# Altium PCB PCB2.PcbDoc (part 2 of 2)
Units mm, origin at the board's own origin, x right, y up, seen from the top; angles counter-clockwise.
Board outline 99.5 x 79.18 mm, 4 copper layers (Top Layer, Int1 (GND), Int2 (PWR), Bottom Layer), stack 1.317 mm thick; 113 components, 127 nets, 520 pads, 144 vias.
Unrouted connection lines stored in the file: 1.
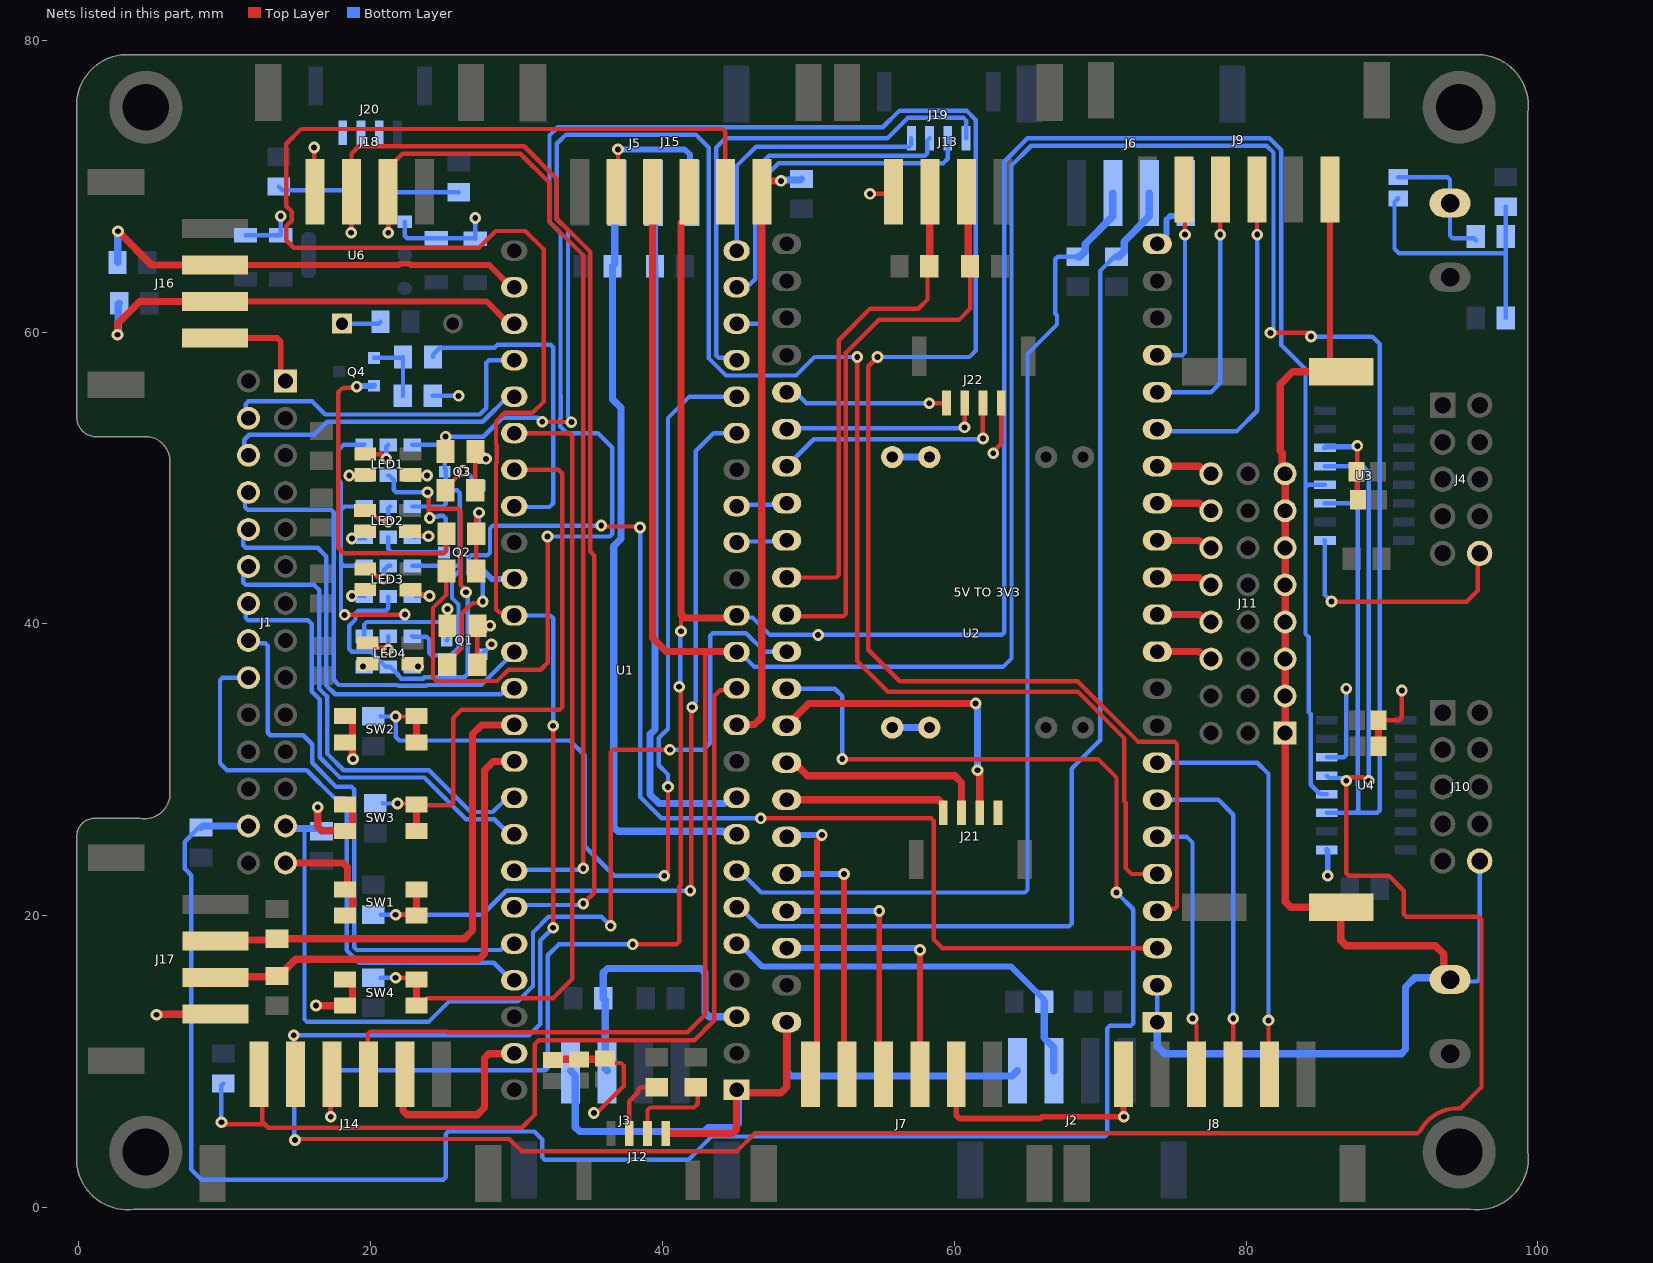
[diagram p4: the nets of this part, all layers, seen from the top]

## Via types
v1: diameter 0.8, hole 0.4, Top Layer to Bottom Layer, tented both sides, 144 vias

## Nets (pads, with @x,y where several pads share a name; then routed paths per layer and width w, separated by ;. In a path a pad name is that pad's centre, name@x,y a point inside that pad or via, vN(x,y) a via of type N, cw(c..) or ccw(c..) an arc to the next point about the centre after c; other vN are vias at no path point) (continued)
ENA3: J6.2 R8.1 U1.7 | length 71.8
  Bottom Layer w0.3: U1.7@45.085,23.074 45.285,23.074 46.769,21.59 64.848,21.59 65.024,21.766 65.024,58.502 67.044,60.522 67.044,61.144 66.929,61.259 66.929,64.984 67.105,65.16 R8.1@68.453,65.16
  Bottom Layer w0.5: R8.1@68.453,65.16 68.603,65.16 68.978,65.535 68.978,66.038 70.867,67.927 J6.2@70.867,69.527
ENA4: J5.2 R7.1 U1.8 | length 52.7
  Bottom Layer w0.5: J5.2@36.885,69.527 36.731,69.373 36.731,64.671 R7.1@36.576,64.516 36.576,55.397 37.164,54.809 37.164,45.84 36.664,45.34 36.664,26.074 36.957,25.781 44.142,25.781 44.177,25.746 44.913,25.746 U1.8@45.085,25.574
ENB1: J3.3 R1.1 U1.3 | length 19.1
  Bottom Layer w0.5: J3.3@36.215,9.368 36.078,9.505 36.078,14.214 R1.1@35.941,14.351 35.941,16.09 36.234,16.383 42.633,16.383 42.926,16.09 42.926,13.367 43.219,13.074 U1.3@45.085,13.074
ENB2: J2.3 R4.1 U1.5 | length 27.8
  Bottom Layer w0.4: U1.5@45.085,18.074 45.285,18.074 46.849,16.51 63.904,16.51 66.167,14.247 R4.1@66.167,14.097
  Bottom Layer w0.5: R4.1@66.167,14.097 66.167,11.623 66.822,10.968 J2.3@66.822,9.368
ENB3: J6.3 R9.1 U1.6 | length 76
  Bottom Layer w0.3: U1.6@45.085,20.574 45.285,20.574 46.589,19.27 67.867,19.27 68.043,19.446 68.043,30.07 69.995,32.022 69.995,64.185 70.97,65.16 R9.1@71.12,65.16
  Bottom Layer w0.5: R9.1@71.12,65.16 71.27,65.16 71.645,65.535 71.645,66.205 73.367,67.927 J6.3@73.367,69.527
ENB4: J5.3 R6.1 U1.9 | length 47.7
  Bottom Layer w0.5: J5.3@39.385,69.527 39.436,69.476 39.436,64.568 R6.1@39.488,64.516 39.488,32.761 39.154,32.428 39.154,28.312 39.781,27.686 44.253,27.686 44.641,28.074 U1.9@45.085,28.074
EP_A: J21.1 U2.38 | length 11.4
  Top Layer w0.5: U2.38@48.514,27.94 58.903,27.94 59.242,27.601 J21.1@59.242,27.051
EP_B: J21.2 U2.37 | length 14.6
  Top Layer w0.5: U2.37@48.514,30.48 49.058,30.48 49.947,29.591 60.032,29.591 60.492,29.131 J21.2@60.492,27.051
EP_C: J21.3 U2.36 | length 21.2
  Top Layer w0.5: U2.36@48.514,33.02 50.038,34.544 v1(61.468,34.544) ; v1(61.595,29.972) 61.595,29.891 61.742,29.744 J21.3@61.742,27.051
  Bottom Layer w0.5: v1(61.468,34.544) 61.468,34.463 61.595,34.336 v1(61.595,29.972)
EP_D: J21.4
EP_E: J22.1 | length 3.7
  Top Layer w0.3: v1(62.674,51.689) 62.674,51.807 63.216,52.349 J22.1@63.216,55.129
EP_F: J22.2 U2.29 | length 16.7
  Top Layer w0.3: J22.2@61.966,55.129 61.966,52.715 v1(61.976,52.705)
  Bottom Layer w0.3: U2.29@48.514,50.8 50.367,52.653 61.924,52.653 v1(61.976,52.705)
EP_G: J22.3 U2.28 | length 13.9
  Top Layer w0.3: v1(60.706,53.467) 60.716,53.477 J22.3@60.716,55.129
  Bottom Layer w0.3: U2.28@48.514,53.34 48.578,53.404 60.642,53.404 v1(60.706,53.467)
EP_H: J22.4 U2.27 | length 11.3
  Top Layer w0.3: v1(58.293,55.118) 59.455,55.118 J22.4@59.466,55.129
  Bottom Layer w0.3: U2.27@48.514,55.88 49.108,55.88 49.87,55.118 v1(58.293,55.118)
ESP_CS: J7.6 U2.39 | length 19.2
  Top Layer w0.4: J7.6@50.138,9.144 50.588,9.594 50.588,25.08 50.927,25.419 v1(50.927,25.527)
  Bottom Layer w0.4: U2.39@48.514,25.4 48.641,25.527 v1(50.927,25.527)
ESP_MISO: J7.4 U2.41 | length 17.6
  Top Layer w0.4: v1(54.864,20.32) 54.864,9.418 J7.4@55.138,9.144
  Bottom Layer w0.4: U2.41@48.514,20.32 v1(54.864,20.32)
ESP_MOSI: J7.3 U2.42 | length 17.7
  Top Layer w0.4: J7.3@57.638,9.144 57.658,9.164 v1(57.658,17.653)
  Bottom Layer w0.4: U2.42@48.514,17.78 57.531,17.78 v1(57.658,17.653)
ESP_RX1: J13.2 R13.2 U2.33 | length 40
  Top Layer w0.3: U2.33@48.514,40.64 48.641,40.513 52.402,40.513 52.578,40.689 52.578,58.58 54.831,60.833 60.325,60.833 61.087,61.595 R13.2@61.087,64.516
  Top Layer w0.5: J13.2@60.848,69.626 60.968,69.506 60.968,64.636 R13.2@61.087,64.516
ESP_SCK: J7.5 U2.40 | length 17.7
  Top Layer w0.4: v1(52.451,22.86) 52.451,9.331 J7.5@52.638,9.144
  Bottom Layer w0.4: U2.40@48.514,22.86 v1(52.451,22.86)
ESP_SCL1: J12.2 R11.2 | length 4.6
  Top Layer w0.3: J12.2@37.729,5.069 37.729,7.29 38.338,7.899 38.338,8.079 38.514,8.255 39.615,8.255 R11.2@39.624,8.246
ESP_SDA1: J12.3 R12.2 | length 6.4
  Top Layer w0.3: J12.3@38.979,5.069 38.979,6.682 39.155,6.858 42.164,6.858 42.418,7.112 42.418,8.119 R12.2@42.291,8.246
ESP_TX1: J13.3 R14.2 U2.32 | length 34.4
  Top Layer w0.3: U2.32@48.514,43.18 51.902,43.18 52.078,43.356 52.078,59.444 54.229,61.595 57.531,61.595 58.166,62.23 58.166,64.389 R14.2@58.293,64.516
  Top Layer w0.5: R14.2@58.293,64.516 58.321,64.544 58.321,69.598 J13.3@58.348,69.626
GND: "5V TO 3V3.2" "5V TO 3V3.3" C1.1 C2.1 C3.1 C4.1 C5.1 C6.1 C7.1 C8.1 C9.2 C10.2 C11.2 C12.2 C13.1 C14.1 H1.1 H2.1 J1.1 J1.27 J2.4 J3.4 J4.10 J5.4 J6.4 J7.2 J8.6 J9.6 J10.10 J11.1 J11.4 J11.7 J11.10 J11.13 J11.16 J11.19 J11.22 J12.4 J13.4 J14.2 J15.2 J16.4 J17.4 J18.4 Q1.2 Q2.2 Q3.2 Q4.2 R25.1 R26.1 R33.1 R41.1 R46.1 SW1.B1 SW1.B2 SW2.B1 SW2.B2 SW3.B1 SW3.B2 SW4.B1 SW4.B2 U1.1 U1.34 U1.47 U2.1 U2.2 U2.22 U2.44 U3.9 U3.14 U4.9 U4.14 U6.1 | length 347.7
  Top Layer w0.3: v1(16.129,72.644) 16.129,69.686 J18.4@16.189,69.626 ; v1(19.05,56.261) 18.962,56.173 18.2,56.173 18.161,56.134 18.034,56.134 17.78,55.88 17.78,45.212 18.161,44.831 25.022,44.831 25.198,45.007 R33.1@25.198,46.167 ; R41.1@25.128,49.149 25.128,49.299 26.313,50.484 v1(26.338,50.484) ; R25.1@25.273,39.878 v1(25.273,41.021) ; v1(35.306,6.477) 35.402,6.573 35.598,6.573 37.338,8.313 37.338,9.73 37.162,9.906 36.375,9.906 C1.1@36.068,10.213 ; J15.2@36.815,69.626 36.957,69.768 v1(36.957,72.517) ; v1(54.229,69.469) 55.691,69.469 J13.4@55.848,69.626 ; v1(85.852,41.529) 95.123,41.529 95.885,42.291 95.885,44.707 J4.10@96.009,44.831 ; C2.1@87.577,50.419 87.63,50.472 v1(87.63,52.197) ; C7.1@89.067,33.401 90.502,33.401 90.678,33.577 v1(90.678,35.433)
  Top Layer w0.4: J16.4@9.34,59.588 13.609,59.588 13.843,59.354 13.843,56.666 J1.1@13.81,56.633 ; J7.2@60.138,9.144 60.138,6.328 60.372,6.094 65.881,6.094 66.011,6.223 v1(71.628,6.223) 71.601,6.25 J8.6@71.601,9.144 ; J9.6@85.752,69.772 85.752,58.027 86.502,57.277 C4.1@86.519,57.277 ; C2.1@87.577,50.419 87.622,50.374 87.622,48.559 C3.1@87.667,48.514
  Top Layer w0.5: v1(5.334,13.208) 5.364,13.238 9.338,13.238 J17.4@9.368,13.268 ; J1.27@13.81,23.613 18.122,23.613 18.415,23.32 18.415,21.973 SW1.B2@18.247,21.805 ; v1(16.256,13.843) 16.267,13.832 SW4.B1@18.247,13.832 ; v1(16.383,27.432) 16.383,26.107 16.676,25.814 SW3.B1@18.247,25.814 ; SW2.B1@18.247,31.878 18.447,31.878 18.747,31.578 18.747,30.783 v1(18.796,30.734) ; SW4.B1@18.755,13.832 SW4.B2@18.755,15.632 ; SW1.B1@18.755,20.005 SW1.B2@18.755,21.805 ; SW3.B1@18.755,25.814 SW3.B2@18.755,27.614 ; SW2.B1@18.755,31.878 SW2.B2@18.755,33.678 ; J14.2@22.359,9.144 22.225,9.01 22.225,6.643 22.518,6.35 27.305,6.35 27.813,6.858 27.813,10.248 28.106,10.541 29.812,10.541 U1.47@29.845,10.574 ; C13.1@32.498,10.123 32.543,10.168 34.29,10.168 36.023,10.168 C1.1@36.068,10.213 ; J12.4@40.229,5.069 40.24,5.08 44.792,5.08 45.085,5.373 U1.1@45.085,8.074 45.285,7.874 48.133,7.874 48.514,8.255 U2.44@48.514,12.7 ; C4.1@86.502,57.277 83.185,57.277 82.335,56.427 82.335,51.845 82.472,51.708 82.472,50.497 J11.22@82.677,50.292 J11.19@82.677,47.752 J11.16@82.677,45.212 J11.13@82.677,42.672 J11.10@82.677,40.132 J11.7@82.677,37.592 J11.4@82.677,35.052 J11.1@82.677,32.512 82.677,20.955 83.058,20.574 C5.1@86.519,20.574 86.487,20.542 86.487,18.327 86.872,17.942 92.969,17.942 93.54,17.371 93.54,16.061 H1.1@93.98,15.621 ; C7.1@89.067,33.401 89.073,33.394 89.073,31.63 C6.1@89.08,31.623
  Bottom Layer w0.3: C9.2@11.43,66.627 C10.2@13.843,66.627 v1(13.843,67.945) ; U6.1@22.338,67.568 22.338,66.597 22.514,66.421 C11.2@24.511,66.421 27.154,66.421 C12.2@27.178,66.397 v1(27.178,67.818) ; R46.1@24.257,55.626 v1(26.035,55.626) ; v1(26.338,50.484) 26.434,50.389 26.569,50.389 Q3.2@27.489,49.469 ; Q1.2@27.616,37.912 28.281,38.577 v1(28.281,38.604) ; U2.1@73.914,12.7 U2.2@73.914,15.24 ; U3.9@85.405,45.72 85.405,41.976 v1(85.852,41.529) ; U4.14@85.532,30.861 86.692,30.861 86.868,31.037 v1(86.868,35.56) ; C8.1@90.424,70.612 93.804,70.612 93.98,70.436 H2.1@93.98,68.834 93.98,66.597 94.156,66.421 95.622,66.421 R26.1@95.749,66.294 ; H1.1@93.98,15.621 94.107,15.494 95.833,15.494 96.009,15.67 J10.10@96.009,23.749
  Bottom Layer w0.4: v1(19.05,56.261) 19.083,56.294 20.205,56.294 Q4.2@20.238,56.327 ; Q2.2@27.432,43.947 28.305,43.074 U1.34@29.845,43.074 ; v1(36.957,72.517) 41.529,72.517 41.885,72.161 J5.4@41.885,69.527 ; U2.22@73.914,66.04 73.943,66.04 74.405,66.502 74.405,66.531 74.549,66.675 74.549,67.711 74.783,67.945 75.417,67.945 75.867,68.395 J6.4@75.867,69.527 ; U3.14@85.405,52.07 85.469,52.133 87.566,52.133 v1(87.63,52.197) ; U4.9@85.532,24.511 85.598,24.445 v1(85.598,22.733)
  Bottom Layer w0.5: J3.4@33.715,9.368 34.036,9.047 34.036,5.5 34.329,5.207 42.861,5.207 43.121,5.468 44.919,5.468 45.212,5.761 45.212,7.947 U1.1@45.085,8.074 ; U2.44@48.514,12.7 48.514,9.31 48.807,9.017 63.971,9.017 J2.4@64.322,9.368 ; 55.753,32.893 58.293,32.893 ; 55.753,51.433 58.293,51.433 ; U2.1@73.914,12.7 73.914,11.033 74.406,10.541 90.639,10.541 90.932,10.834 90.932,15.113 91.567,15.748 93.853,15.748 H1.1@93.98,15.621
IN_BUZZER: R44.1 U1.32 | length 22.2
  Bottom Layer w0.3: R44.1@24.275,58.293 24.275,58.443 24.75,58.918 28.494,58.918 28.7,59.124 32.336,59.124 32.512,58.948 32.512,48.26 32.258,48.006 29.913,48.006 U1.32@29.845,48.074
LED_B: Q2.3 R21.2 R30.2 R36.2 R42.2 | length 42.3
  Top Layer w0.3: v1(23.903,49.022) 23.981,48.944 23.981,47.879 ; v1(24.058,47.25) 23.981,47.328 23.981,47.752 23.981,47.879 ; v1(26.543,42.164) 26.543,42.299 26.173,42.669 26.173,47.703 25.997,47.879 23.981,47.879
  Bottom Layer w0.3: R36.2@21.209,41.876 21.209,41.07 21.033,40.894 19.146,40.894 18.97,40.718 18.97,40.307 18.542,39.879 18.542,38.276 18.718,38.1 20.053,38.1 20.508,37.645 20.508,37.601 21.059,37.05 R42.2@21.209,37.05 21.359,37.05 21.903,36.506 21.903,36.462 22.115,36.25 23.605,36.25 23.689,36.334 26.428,36.334 26.67,36.576 26.67,42.037 v1(26.543,42.164) ; R30.2@21.209,45.94 21.209,45.134 21.446,44.897 Q2.3@25.032,44.897 25.146,45.011 25.146,47.227 24.97,47.402 24.67,47.402 24.614,47.346 24.154,47.346 v1(24.058,47.25) ; R21.2@21.209,50.165 21.29,50.165 21.59,49.865 21.59,49.198 21.766,49.022 v1(23.903,49.022) v1@23.903,49.049
LED_BLUE: R31.1 U2.4 | length 169.3
  Top Layer w0.3: R31.1@25.198,43.627 25.198,42.007 24.28,41.089 24.28,36.291 24.485,36.086 28.672,36.086 29.449,36.863 31.656,36.863 32.131,37.338 v1(32.131,45.986) ; v1(54.737,58.293) 54.102,57.658 54.102,38.227 56.261,36.068 68.453,36.068 72.591,31.93 75.088,31.93 75.264,31.754 75.264,20.648 75.088,20.472 74.066,20.472 U2.4@73.914,20.32
  Bottom Layer w0.3: v1(32.131,45.986) 36.388,45.986 36.564,46.162 36.564,52.082 35.572,53.074 33.451,53.074 33.012,53.513 33.012,54.134 33.028,54.151 33.028,55.618 33.012,55.634 33.012,66.798 32.266,67.544 32.266,73.478 32.821,74.033 43.96,74.033 43.966,74.027 55.106,74.027 56.255,75.176 60.844,75.176 61.463,74.557 61.463,58.718 61.038,58.293 v1(54.737,58.293)
LED_G: Q3.3 R24.2 R32.2 R37.2 R45.2 | length 28.2
  Bottom Layer w0.3: R45.2@22.86,39.15 22.894,39.116 23.827,39.116 24.003,38.94 24.003,38.022 24.179,37.846 25.495,37.846 26.023,38.374 26.023,41.332 25.584,41.771 25.584,43.11 26.119,43.645 26.119,43.991 ; R37.2@22.86,43.976 26.104,43.976 26.119,43.991 ; R32.2@22.86,48.04 24.97,48.04 25.146,48.216 25.146,49.149 ; R24.2@22.86,52.265 24.652,52.265 25.089,51.828 25.089,50.669 25.142,50.616 25.146,50.616 25.146,49.149 ; 25.146,49.149 25.943,49.149 26.119,48.973 26.119,43.991
LED_GREEN: R39.1 U2.5 | length 119.1
  Top Layer w0.3: R39.1@25.137,51.816 25.146,51.825 v1(25.146,52.832) ; v1(31.762,53.848) 31.774,53.836 33.75,53.836 v1(33.762,53.824) ; v1(53.352,58.293) 53.352,37.453 55.448,35.357 68.457,35.357 71.64,32.174 71.64,27.846 71.743,27.743 71.743,23.268 72.151,22.86 U2.5@73.914,22.86
  Bottom Layer w0.3: v1(25.146,52.832) 27.727,52.832 29.02,54.124 31.466,54.124 31.742,53.848 v1(31.762,53.848) ; v1(33.762,53.824) 33.762,53.959 33.528,54.193 33.528,66.989 32.766,67.751 32.766,72.898 33.401,73.533 42.291,73.533 43.188,72.636 43.188,58.195 44.359,57.024 49.163,57.024 50.432,58.293 v1(53.352,58.293)
LED_R: Q1.3 R19.2 R29.2 R34.2 R40.2 | length 29.2
  Top Layer w0.3: v1(18.22,40.618) 18.231,40.629 22.341,40.629 v1(22.352,40.64)
  Bottom Layer w0.3: v1(18.22,40.618) 18.22,40.644 17.97,40.894 17.97,44.152 ; R40.2@19.558,39.15 19.558,39.956 19.734,40.132 22.415,40.132 ; R34.2@19.558,43.976 18.146,43.976 17.97,44.152 ; R29.2@19.558,48.04 18.195,48.04 17.97,47.815 ; R19.2@19.558,52.265 18.146,52.265 17.792,51.911 17.792,49.854 17.97,49.676 17.97,47.815 ; v1(22.352,40.64) 22.415,40.576 22.415,40.132 ; Q1.3@25.216,38.862 25.273,38.919 25.273,39.956 25.097,40.132 22.415,40.132 ; 17.97,44.152 17.97,47.815
LED_RED: R23.1 U2.3 | length 86.1
  Top Layer w0.3: R23.1@25.255,37.211 25.255,37.361 26.248,38.354 26.248,40.698 26.983,41.433 27.59,41.433 v1(27.686,41.529) ; v1(35.814,46.736) 35.877,46.672 38.401,46.672 v1(38.465,46.609) ; v1(46.736,26.67) 58.416,26.67 58.592,26.494 58.592,18.37 59.182,17.78 U2.3@73.914,17.78
  Bottom Layer w0.3: v1(27.686,41.529) 27.686,42.906 27.438,43.154 26.93,43.154 26.682,43.402 26.682,44.492 26.887,44.697 28.006,44.697 28.182,44.873 28.182,46.548 28.37,46.736 v1(35.814,46.736) ; v1(38.465,46.609) 38.481,46.593 38.481,28.137 39.948,26.67 v1(46.736,26.67)
MISO: J14.4 J15.4 U1.14 U3.12 U4.12 | length 212.1
  Top Layer w0.3: v1(17.272,6.223) 17.272,9.057 J14.4@17.359,9.144 ; v1(37.973,18.034) 40.972,18.034 41.148,18.21 41.148,22.016 41.263,22.131 41.263,35.261 41.244,35.281 41.244,35.591 v1(41.148,35.687) ; v1(41.275,39.497) 41.275,40.567 41.334,40.627 41.275,40.627
  Top Layer w0.5: 41.275,40.627 41.275,67.486 41.815,68.026 J15.4@41.815,69.626 ; 41.334,40.627 41.563,40.398 44.142,40.398 44.146,40.402 44.913,40.402 U1.14@45.085,40.574
  Bottom Layer w0.3: v1(17.272,6.223) 17.272,9.017 17.653,9.398 31.965,9.398 32.141,9.574 32.141,17.282 32.893,18.034 v1(37.973,18.034) ; v1(41.148,35.687) 41.212,35.75 41.212,39.433 v1(41.275,39.497) ; U1.14@45.085,40.574 45.221,40.438 46.176,40.438 47.371,39.243 v1(50.673,39.243) 63.248,39.243 63.424,39.419 63.424,71.679 65.024,73.279 81.606,73.279 82.423,72.462 82.423,59.098 84.074,57.447 84.074,49.354 ; U3.12@85.405,49.53 84.25,49.53 84.074,49.354 ; U4.12@85.532,28.321 85.082,28.321 84.432,28.971 84.432,33.827 84.305,33.954 84.305,39.08 84.074,39.311 84.074,49.354
MOSI: J14.3 J15.3 U1.13 U3.11 U4.11 | length 239.4
  Top Layer w0.3: J14.3@19.859,9.144 19.812,9.191 19.812,11.889 19.988,12.065 25.213,12.065 25.254,12.024 41.742,12.024 42.926,13.208 42.926,38.1 ; v1(81.673,59.944) 84.201,59.944 v1(84.455,59.69)
  Top Layer w0.5: J15.3@39.315,69.626 39.315,39.044 40.259,38.1 42.926,38.1 45.059,38.1 U1.13@45.085,38.074
  Bottom Layer w0.3: U1.13@45.085,38.074 45.085,37.973 45.386,37.973 46.309,37.05 63.339,37.05 63.924,37.635 63.924,71.417 65.278,72.771 81.407,72.771 81.879,72.299 81.879,60.15 v1(81.673,59.944) ; v1(84.455,59.69) 88.646,59.69 89.154,59.182 89.154,27.227 88.978,27.051 87.503,27.051 ; U3.11@85.405,48.26 87.249,48.26 87.654,47.855 87.654,28.938 87.679,28.914 87.679,27.227 87.503,27.051 ; U4.11@85.532,27.051 87.503,27.051
NetC8_2: C8.2 R20.1 R22.2 R26.2 | length 18.9
  Bottom Layer w0.3: C8.2@90.424,69.162 90.17,68.908 90.17,65.708 90.473,65.405 97.799,65.405 ; R22.2@97.79,60.96 97.799,60.969 97.799,65.405 ; R26.2@97.79,66.303 R20.1@97.79,68.58 ; R26.2@97.799,66.294 97.799,65.405
NetLED1_2: LED1.2 R24.1 | length 2.2
  Top Layer w0.3: LED1.2@22.733,50.217 22.785,50.165 v1(23.876,50.165)
  Bottom Layer w0.3: R24.1@22.86,50.165 v1(23.876,50.165)
NetLED1_3: LED1.3 R21.1 | length 2.6
  Top Layer w0.3: LED1.3@19.633,51.634 20.756,51.634 v1(21.076,51.314)
  Bottom Layer w0.3: v1(21.076,51.314) 21.076,52.132 R21.1@21.209,52.265
NetLED1_4: LED1.4 R19.1 | length 2.1
  Top Layer w0.3: v1(18.542,50.165) 19.578,50.165 LED1.4@19.633,50.22
  Bottom Layer w0.3: v1(18.542,50.165) R19.1@19.558,50.165
NetLED2_2: LED2.2 R32.1 | length 2.4
  Top Layer w0.3: LED2.2@22.733,46.355 23.033,46.055 23.922,46.055 v1(23.973,46.004)
  Bottom Layer w0.3: R32.1@22.987,45.94 23.051,46.004 v1(23.973,46.004)
NetLED2_3: LED2.3 R30.1 | length 3
  Top Layer w0.3: LED2.3@19.633,47.772 19.933,47.772 20.62,47.086 21.113,47.086 v1(21.209,46.99)
  Bottom Layer w0.3: v1(21.209,46.99) 21.209,47.913 R30.1@21.336,48.04
NetLED2_4: LED2.4 R29.1 | length 2
  Top Layer w0.3: v1(18.72,45.847) 18.812,45.847 19.322,46.357 LED2.4@19.633,46.357
  Bottom Layer w0.3: v1(18.72,45.847) R29.1@19.592,45.847
NetLED3_2: LED3.2 R37.1 | length 2.4
  Top Layer w0.3: LED3.2@22.733,42.343 23.033,42.043 23.862,42.043 23.995,41.91 v1(24.041,41.91)
  Bottom Layer w0.3: R37.1@23.114,41.876 23.148,41.91 v1(24.041,41.91)
NetLED3_3: LED3.3 R36.1 | length 2.7
  Top Layer w0.3: LED3.3@19.633,43.76 19.933,43.76 20.499,43.195 20.805,43.195 v1(20.901,43.099)
  Bottom Layer w0.3: v1(20.901,43.099) 20.901,43.676 21.201,43.976 R36.1@21.336,43.976
NetLED3_4: LED3.4 R34.1 | length 1.9
  Top Layer w0.3: v1(18.72,41.91) 18.816,42.006 18.993,42.006 19.033,42.045 19.333,42.045 LED3.4@19.633,42.346
  Bottom Layer w0.3: v1(18.72,41.91) 19.524,41.91 R34.1@19.558,41.876
NetLED4_2: LED4.2 R45.1 | length 0.8
  Top Layer w0.3: LED4.2@22.886,37.263 23.074,37.263 v1(23.253,37.084)
  Bottom Layer w0.3: R45.1@22.86,37.05 22.894,37.084 v1(23.253,37.084)
NetLED4_3: LED4.3 R42.1 | length 2.5
  Top Layer w0.3: LED4.3@19.786,38.68 20.086,38.381 20.92,38.381 21.074,38.227 v1(21.209,38.227) v1@21.209,38.6
  Bottom Layer w0.3: v1@21.209,38.6 R42.1@21.209,39.15
NetLED4_4: LED4.4 R40.1 | length 0.6
  Top Layer w0.3: v1(19.485,37.084) 19.667,37.266 LED4.4@19.786,37.266
  Bottom Layer w0.3: v1(19.485,37.084) 19.651,37.084 R40.1@19.685,37.05
NetLS1_1: LS1.1 R47.1 | length 2.7
  Bottom Layer w0.3: LS1.1@18.044,60.579 20.556,60.579 R47.1@20.683,60.706
NetQ1_1: Q1.1 R23.2 R25.2 | length 4.2
  Top Layer w0.3: R23.2@27.305,37.211 27.323,37.229 R25.2@27.323,39.878 v1(28.194,39.878)
  Bottom Layer w0.3: Q1.1@27.616,39.812 27.649,39.845 28.161,39.845 v1(28.194,39.878)
NetQ2_1: Q2.1 R31.2 R33.2 | length 5.9
  Top Layer w0.3: R31.2@27.248,43.627 27.248,47.306 27.432,47.49 v1(27.432,47.625)
  Bottom Layer w0.3: Q2.1@27.432,45.847 v1(27.432,47.625)
NetQ3_1: Q3.1 R39.2 R41.2 | length 4.1
  Top Layer w0.3: R41.2@27.178,49.149 27.178,51.807 R39.2@27.187,51.816 27.568,51.435 27.568,51.402 27.662,51.308 v1(27.907,51.308)
  Bottom Layer w0.3: Q3.1@27.489,51.369 27.846,51.369 v1(27.907,51.308)
NetQ4_1: Q4.1 R44.2 R46.2 | length 4.7
  Bottom Layer w0.3: Q4.1@20.238,58.227 22.159,58.227 R44.2@22.225,58.293 22.225,55.644 R46.2@22.207,55.626
OUT_A: J19.1 U1.24 | length 18.8
  Bottom Layer w0.3: U1.24@45.085,65.574 45.085,71.374 46.416,72.705 56.913,72.705 57.063,72.855 J19.1@57.063,73.279
OUT_B: J19.2 U1.23 | length 22.4
  Bottom Layer w0.3: U1.23@45.085,63.074 45.295,63.284 46.012,63.284 46.358,63.63 46.358,71.128 47.309,72.079 57.987,72.079 58.163,72.255 58.163,73.129 J19.2@58.313,73.279
OUT_C: J19.3 U1.22 | length 26.3
  Bottom Layer w0.3: U1.22@45.085,60.574 46.682,60.574 46.858,60.75 46.858,70.47 47.967,71.579 59.26,71.579 59.563,71.882 J19.3@59.563,73.279
OUT_D: J19.4 U1.21 | length 35
  Bottom Layer w0.3: U1.21@45.085,58.074 44.933,58.226 43.864,58.226 43.688,58.402 43.688,72.644 44.323,73.279 55.418,73.279 56.815,74.676 60.637,74.676 60.813,74.5 J19.4@60.813,73.279
OUT_E: J20.1
OUT_F: J20.2
OUT_G: J20.3
PWM_A: J11.18 U2.14 | length 3.9
  Top Layer w0.5: U2.14@73.914,45.72 76.799,45.72 77.307,45.212 J11.18@77.597,45.212
PWM_A1: J1.6 U1.29 | length 20.8
  Bottom Layer w0.3: J1.6@11.27,51.553 11.337,51.62 11.337,52.612 11.683,52.958 16.128,52.958 17.018,53.848 27.686,53.848 29.412,55.574 U1.29@29.845,55.574
PWM_A2: J1.4 U1.28 | length 23.2
  Bottom Layer w0.3: J1.4@11.27,54.093 11.44,54.263 11.44,55.069 11.616,55.245 16.002,55.245 16.899,54.348 27.479,54.348 27.94,54.809 27.94,57.898 28.116,58.074 U1.28@29.845,58.074
PWM_B: J11.21 U2.15 | length 3.9
  Top Layer w0.5: U2.15@73.914,48.26 76.799,48.26 77.307,47.752 J11.21@77.597,47.752
PWM_B1: J1.10 U1.37 | length 29.3
  Bottom Layer w0.3: J1.10@11.27,46.473 11.387,46.356 11.387,45.886 11.27,45.769 11.27,45.388 11.446,45.212 16.383,45.212 16.97,44.625 16.97,35.783 17.574,35.179 28.952,35.179 29.347,35.574 U1.37@29.845,35.574
PWM_B2: J1.8 U1.36 | length 32.1
  Bottom Layer w0.3: J1.8@11.396,48.887 11.396,47.992 11.571,47.817 17.294,47.817 17.47,47.641 17.47,36.165 17.822,35.814 21.844,35.814 21.908,35.75 23.812,35.75 23.876,35.814 27.585,35.814 U1.36@29.845,38.074
PWM_C: J11.24 U2.16 | length 3.9
  Top Layer w0.5: U2.16@73.914,50.8 76.799,50.8 77.307,50.292 J11.24@77.597,50.292
PWM_C1: J1.16 U1.44 | length 37.8
  Bottom Layer w0.3: J1.16@11.457,38.666 12.778,38.666 12.954,38.49 12.954,32.544 13.13,32.368 15.384,32.368 16.002,31.75 16.002,30.48 17.653,28.829 18.699,28.829 18.874,28.653 18.874,17.829 19.05,17.653 28.926,17.653 29.347,18.074 U1.44@29.845,18.074
PWM_C2: J1.18 U1.45 | length 39.7
  Bottom Layer w0.3: J1.18@11.27,36.313 9.853,36.313 9.678,36.137 9.678,30.454 10.16,29.972 15.621,29.972 17.526,28.067 18.199,28.067 18.374,27.891 18.374,17.622 19.218,16.777 28.442,16.777 29.645,15.574 U1.45@29.845,15.574
PWM_D1: J1.12 U1.40 | length 32.8
  Bottom Layer w0.3: J1.12@11.27,43.933 11.27,42.848 11.446,42.672 16.129,42.672 16.47,42.331 16.47,35.576 17.018,35.028 17.018,31.115 18.161,29.972 24.003,29.972 26.869,27.106 28.379,27.106 29.347,28.074 U1.40@29.845,28.074
PWM_D2: J1.14 U1.41 | length 30.6
  Bottom Layer w0.3: J1.14@11.27,41.393 11.436,41.227 11.436,40.412 11.612,40.237 15.731,40.237 15.97,39.998 15.97,35.368 16.518,34.821 16.518,30.853 17.899,29.472 23.677,29.472 26.543,26.606 28.475,26.606 29.507,25.574 U1.41@29.845,25.574
SCK: J14.5 J15.5 U1.35 U3.13 U4.13 | length 287.7
  Top Layer w0.3: v1(14.732,11.811) 14.732,9.271 J14.5@14.859,9.144 ; v1(14.817,4.631) 14.885,4.699 29.51,4.699 30.34,3.869 45.118,3.869 46.329,5.08 91.753,5.08 91.957,5.284 cw(c94.473,3.946) 94.551,6.795 94.679,6.795 96.139,8.255 96.139,19.763 95.963,19.939 90.981,19.939 90.805,20.115 90.805,21.717 89.789,22.733 87.044,22.733 86.868,22.909 86.868,29.499 88.019,29.499 88.269,29.249 v1(88.404,29.249) ; U1.35@29.845,40.574 29.643,40.776 28.82,40.776 28.595,41.001 28.595,51.009 28.657,51.071 28.657,52.259 28.595,52.321 28.595,53.868 29.188,54.461 31.093,54.461 31.877,55.245 31.877,65.659 30.607,66.929 28.575,66.929 27.429,65.783 14.735,65.783 14.224,66.294 14.224,67.265 14.593,67.634 14.593,68.256 14.224,68.625 14.224,72.898 15.24,73.914 44.139,73.914 44.315,73.738 J15.5@44.315,69.626 ; v1(32.512,19.177) v1(32.512,33.02)
  Bottom Layer w0.3: v1(14.817,4.631) 14.775,4.673 14.775,11.768 v1(14.732,11.811) 30.861,11.811 31.631,12.581 31.631,18.296 v1(32.512,19.177) ; U1.35@29.845,40.574 32.324,40.574 32.512,40.386 v1(32.512,33.02) ; U3.13@85.405,50.8 88.011,50.8 88.404,50.407 v1(88.404,29.249) ; U4.13@85.532,29.591 85.682,29.441 86.541,29.441 86.733,29.249 v1(86.868,29.249)
SCL_TELE: U1.16 U2.31 | length 3.5
  Bottom Layer w0.3: U1.16@45.085,45.574 45.158,45.647 48.441,45.647 U2.31@48.514,45.72
SCL_VAN: J1.26 R53.1 U2.35 | length 149.6
  Top Layer w0.3: v1(52.324,30.734) 69.85,30.734 71.12,29.464 v1(71.12,21.59)
  Bottom Layer w0.3: R53.1@8.382,26.047 8.232,26.047 7.257,25.072 7.257,23.227 7.717,22.767 7.717,2.603 8.414,1.905 24.97,1.905 25.146,2.081 25.146,5.031 25.322,5.207 31.221,5.207 31.765,4.663 31.765,3.457 31.941,3.281 41.783,3.281 43.37,4.868 70.309,4.868 70.485,5.044 70.485,12.27 70.661,12.446 72.087,12.446 72.263,12.622 72.263,20.447 v1(71.12,21.59) ; U2.35@48.514,35.56 51.816,35.56 52.324,35.052 v1(52.324,30.734)
  Bottom Layer w0.5: R53.1@8.382,26.047 8.488,26.153 J1.26@11.27,26.153
SDA_TELE: U1.17 U2.30 | length 3.5
  Bottom Layer w0.3: U1.17@45.085,48.074 45.178,48.167 48.421,48.167 U2.30@48.514,48.26
SDA_VAN: J1.25 R54.1 U2.34 | length 74.4
  Top Layer w0.3: v1(36.449,19.304) 36.449,31.193 36.625,31.369 v1(40.513,31.369)
  Bottom Layer w0.3: 15.471,25.971 15.471,12.899 15.647,12.723 23.976,12.723 25.377,14.124 30.08,14.124 31.131,15.175 31.131,18.857 32.201,19.927 35.826,19.927 v1(36.449,19.304) ; v1(40.513,31.369) 42.799,31.369 43.287,31.857 43.287,39.194 43.463,39.37 45.72,39.37 46.99,38.1 U2.34@48.514,38.1
  Bottom Layer w0.5: J1.25@13.991,25.971 15.471,25.971 16.455,25.971 R54.1@16.637,25.79
SERVO_A: J11.9 U2.11 | length 3.9
  Top Layer w0.5: U2.11@73.914,38.1 76.799,38.1 77.307,37.592 J11.9@77.597,37.592
SERVO_B: J11.12 U2.12 | length 3.9
  Top Layer w0.5: U2.12@73.914,40.64 76.799,40.64 77.307,40.132 J11.12@77.597,40.132
SERVO_C: J11.15 U2.13 | length 3.9
  Top Layer w0.5: U2.13@73.914,43.18 76.799,43.18 77.307,42.672 J11.15@77.597,42.672
STEPA_DIR: J8.3 U2.7 | length 23.4
  Top Layer w0.3: J8.3@79.101,9.144 79.121,9.164 v1(79.121,12.954)
  Bottom Layer w0.3: U2.7@73.914,27.94 78.105,27.94 79.121,26.924 v1(79.121,12.954)
STEPA_EN: J8.4 U2.6 | length 18.6
  Top Layer w0.3: v1(76.327,12.954) 76.327,12.819 76.601,12.545 J8.4@76.601,9.144
  Bottom Layer w0.3: U2.6@73.914,25.4 75.946,25.4 76.327,25.019 v1(76.327,12.954)
STEPA_PUL: J8.2 U2.8 | length 28.5
  Top Layer w0.3: v1(81.534,12.827) 81.534,9.211 J8.2@81.601,9.144
  Bottom Layer w0.3: U2.8@73.914,30.48 80.772,30.48 81.534,29.718 v1(81.534,12.827)
STEPB_DIR: J9.3 U2.18 | length 17.8
  Top Layer w0.3: v1(78.232,66.675) 78.232,69.752 J9.3@78.252,69.772
  Bottom Layer w0.3: U2.18@73.914,55.88 77.597,55.88 78.232,56.515 v1(78.232,66.675)
STEPB_EN: J9.2 U2.19 | length 13.3
  Top Layer w0.3: J9.2@75.752,69.772 75.819,69.705 v1(75.819,66.677) v1@75.819,66.548
  Bottom Layer w0.3: U2.19@73.914,58.42 75.643,58.42 75.819,58.596 v1(75.819,66.677)
STEPB_PUL: J9.4 U2.17 | length 22.7
  Top Layer w0.3: J9.4@80.752,69.772 80.752,66.695 v1(80.772,66.675)
  Bottom Layer w0.3: U2.17@73.914,53.34 74.041,53.213 79.375,53.213 80.772,54.61 v1(80.772,66.675)
SWITCH_A: R35.1 SW1.A1 SW1.A2 U1.19 | length 58.7
  Top Layer w0.3: v1(21.717,20.066) SW1.A1@23.147,20.066 ; v1(41.91,21.717) 41.974,21.78 41.974,34.227 v1(42.037,34.29)
  Top Layer w0.5: SW1.A1@23.147,20.005 23.147,20.066 SW1.A2@23.147,21.805
  Bottom Layer w0.3: R35.1@20.701,20.066 v1(21.717,20.066) 27.652,20.066 29.303,21.717 v1(41.91,21.717) ; v1(42.037,34.29) 42.037,34.425 42.291,34.679 42.291,51.84 43.525,53.074 U1.19@45.085,53.074
SWITCH_B: R38.2 SW2.A1 SW2.A2 U1.20 | length 69
  Top Layer w0.3: v1(21.717,33.655) SW2.A2@23.147,33.655 ; v1(40.132,22.733) 40.132,22.868 40.386,23.122 v1(40.386,28.829)
  Top Layer w0.5: SW2.A1@23.147,31.878 23.147,33.655 SW2.A2@23.147,33.678
  Bottom Layer w0.3: R38.2@20.701,33.664 20.71,33.655 v1(21.717,33.655) 21.717,32.258 21.971,32.004 33.655,32.004 33.658,32.007 34.671,30.993 34.671,24.765 36.703,22.733 v1(40.132,22.733) ; v1(40.386,28.829) 40.38,28.835 40.38,29.679 39.754,30.305 39.754,32.179 40.386,32.811 40.386,54.102 41.858,55.574 U1.20@45.085,55.574
SWITCH_C: R43.2 SW3.A1 SW3.A2 U1.31 | length 39.7
  Top Layer w0.3: v1(21.844,27.686) SW3.A2@23.147,27.686 ; SW3.A2@23.147,27.614 23.202,27.559 25.478,27.559 25.654,27.735 25.654,33.528 26.25,34.124 32.971,34.124 33.147,34.3 33.147,50.292 32.865,50.574 U1.31@29.845,50.574
  Top Layer w0.5: SW3.A1@23.147,25.814 SW3.A2@23.147,27.614
  Bottom Layer w0.3: R43.2@20.828,27.704 20.846,27.686 v1(21.844,27.686)
SWITCH_D: R48.2 SW4.A1 SW4.A2 U1.30 | length 57
  Top Layer w0.3: v1(21.717,15.748) SW4.A2@23.147,15.748 ; SW4.A1@23.147,13.832 23.347,13.832 23.866,14.351 32.512,14.351 33.829,15.668 33.829,52.898 33.653,53.074 U1.30@29.845,53.074
  Top Layer w0.5: SW4.A1@23.147,13.832 SW4.A2@23.147,15.632
  Bottom Layer w0.3: R48.2@20.701,15.748 v1(21.717,15.748)
TEENSY_CS1: J15.6 R56.2 U1.11 | length 41.2
  Top Layer w0.5: U1.11@45.085,33.074 45.112,33.101 46.309,33.101 46.815,33.607 46.815,69.958 47.215,70.358 v1(48.133,70.358)
  Bottom Layer w0.5: v1(48.133,70.358) 48.19,70.415 49.451,70.415 R56.2@49.53,70.494
TEENSY_CS2: J14.6 R55.2 U1.12 | length 70.1
  Top Layer w0.3: v1(9.779,5.842) 9.875,5.746 10.046,5.746 10.078,5.715 12.749,5.715 ; J14.6@12.359,9.144 12.573,8.93 12.573,5.891 12.749,5.715 ; U1.12@45.085,35.574 44.973,35.462 43.971,35.462 43.561,35.052 43.561,12.827 42.192,11.458 31.524,11.458 31.242,11.176 31.242,6.35 30.365,5.473 12.991,5.473 12.749,5.715
  Bottom Layer w0.3: v1(9.779,5.842) 9.779,8.373 R55.2@9.906,8.5
TEENSY_RX1: J16.2 R15.2 U1.26 | length 31
  Top Layer w0.4: J16.2@9.34,64.588 21.928,64.588 22.021,64.681 22.683,64.681 22.776,64.588 28.131,64.588 29.645,63.074 U1.26@29.845,63.074
  Top Layer w0.5: v1(2.692,66.904) 5.008,64.588 J16.2@9.34,64.588
  Bottom Layer w0.5: R15.2@2.654,64.766 R15.2@2.649,64.77 2.671,64.792 2.671,66.882 v1(2.692,66.904)
TEENSY_RX2: J18.3 R28.2 U1.43 | length 84.3
  Top Layer w0.3: v1(18.669,66.802) 18.669,69.606 J18.3@18.689,69.626 18.689,72.222 19.193,72.726 30.525,72.726 32.766,70.485 32.766,67.78 35.064,65.482 35.064,44.946 35.329,44.681 35.329,21.578 v1(34.579,20.828)
  Bottom Layer w0.3: R28.2@13.716,69.968 13.961,69.723 18.415,69.723 18.669,69.469 v1(18.669,66.802) ; U1.43@29.845,20.574 30.003,20.732 34.483,20.732 v1(34.579,20.828)
TEENSY_SCL1: J17.2 R17.1 U1.38 | length 34.5
  Top Layer w0.5: J17.2@9.368,18.268 9.441,18.341 13.515,18.341 R17.1@13.589,18.415 26.416,18.415 26.987,18.986 26.987,32.448 27.613,33.074 U1.38@29.845,33.074
TEENSY_SDA1: J17.3 R18.2 U1.39 | length 34
  Top Layer w0.5: J17.3@9.368,15.768 9.421,15.822 13.536,15.822 R18.2@13.589,15.875 13.739,15.875 14.882,17.018 27.432,17.018 27.813,17.399 27.813,29.972 28.415,30.574 U1.39@29.845,30.574
TEENSY_TX1: J16.3 R16.2 U1.27 | length 31.4
  Top Layer w0.4: J16.3@9.34,62.088 27.955,62.088 29.469,60.574 U1.27@29.845,60.574
  Top Layer w0.5: v1(2.658,59.817) 2.658,60.57 4.176,62.088 J16.3@9.34,62.088
  Bottom Layer w0.5: v1(2.658,59.817) 2.715,59.874 2.715,61.915 R16.2@2.776,61.976
TEENSY_TX2: J18.2 R27.2 U1.42 | length 77
  Top Layer w0.3: v1(21.209,66.802) 21.209,69.606 J18.2@21.189,69.626 21.189,71.226 22.189,72.226 30.263,72.226 32.258,70.231 32.258,67.581 34.564,65.275 34.564,23.256 v1(34.579,23.241)
  Bottom Layer w0.3: v1(21.209,66.802) 21.209,69.411 21.385,69.587 R27.2@26.035,69.587 ; U1.42@29.845,23.074 29.929,23.158 34.495,23.158 v1(34.579,23.241)
pads on no net: J1.19 J1.20 J1.21 J1.22 J1.23 J1.24 J2.5 J2.6 J3.5 J3.6 J5.5 J5.6 J6.5 J6.6 J7.7 J7.8 J8.5 J8.7 J8.8 J9.5 J9.7 J9.8 J12.5 J12.6 J13.5 J13.6 J14.7 J14.8 J15.7 J15.8 J16.5 J16.6 J17.5 J17.6 J18.5 J18.6 J19.5 J19.6 J20.5 J20.6 J21.5 J21.6 J22.5 J22.6 U1.15 U1.25 U1.46 U2.20 U2.21 U2.23 U2.24 U2.25 U2.26

## Polygon pours and split planes (outlines as drawn)
GND on Int1 (GND) (split plane): 205 vertices, not listed, extent 0.352,0.352 98.835,78.515
3.3 on Int2 (PWR) (split plane): 205 vertices, not listed, extent 0.352,0.352 98.835,78.515

## Keep-outs
Keep-Out Layer:
  lines w0.254: 0,3.175 0,25.527 cw(c1.079,25.463) 1.143,26.543 4.191,26.543 ccw(c4.508,28.384) 6.35,28.067 6.35,51.181 ; 0,3.81 ccw(c3.365,3.365) 3.934,0.019 ; 0,75.819 0,55.372 0,54.165 ccw(c1.175,54.134) 1.143,52.959 4.826,52.959 cw(c4.508,51.117) 6.35,50.8 ; 0.019,74.933 cw(c3.365,75.501) 3.81,78.867 ; 3.048,0 95.885,0 ; 3.175,78.867 96.139,78.867 ; 95.253,78.848 cw(c95.822,75.501) 99.187,75.057 ; 95.377,0 ccw(c95.822,3.365) 99.168,3.934 ; 99.187,3.556 99.187,75.692